# EAGLE board jst parallel (EAGLE 9.6.2)
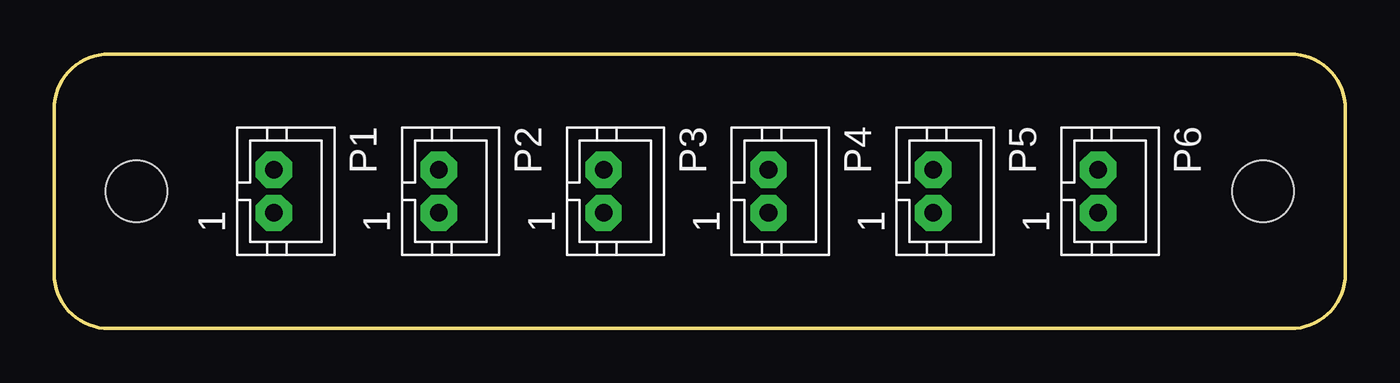
[diagram p0: board, top side]
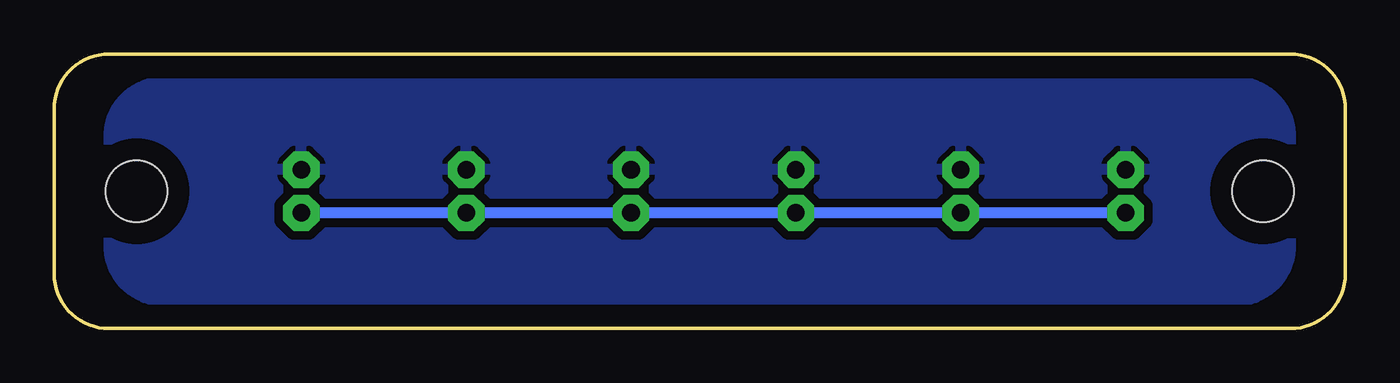
[diagram p1: board, bottom side, seen from below]

Size 59.69 x 12.7 mm. Coordinates in mm from the lower left corner, seen from the top.
Outline: 2.54,12.7 57.15,12.7 arc-90 59.69,10.16 59.69,2.54 arc-90 57.15,0 2.54,0 arc-90 0,2.54 0,10.16 arc-90 2.54,12.7
Copper layers (1*16): Top 0.035mm / dielectric 1.5mm / Bottom 0.035mm
Design rules "default": minimum track width 6mil, minimum drill 0.35mm, track to track 6mil, track to pad 6mil, pad to pad 6mil, via to via 6mil, smd to smd 6mil, copper to edge 40mil, drill to drill 6mil, minimum pad ring 10mil, minimum via ring 8mil, stop-mask expansion 4mil, vias tented up to drill 0mil, thermal gap 10mil
Holes 2.84 mm at 3.81,6.35 55.88,6.35

## Footprints (pad centres in the part's own frame; a part is rotated, then mirrored left to right if it is on the bottom)
JST-PH2 = drill 0.813 pad 1.676 octagon: 1 1,0; 2 -1,0

## Placement (x,y rotation side)
P1  [JST-PH2]  10.16,6.35 270 top
P2  [JST-PH2]  17.78,6.35 270 top
P3  [JST-PH2]  25.4,6.35 270 top
P4  [JST-PH2]  33.02,6.35 270 top
P5  [JST-PH2]  40.64,6.35 270 top
P6  [JST-PH2]  48.26,6.35 270 top

## Library data of the parts
P1-P6 = jst-ph

## Nets
GND: P1.2 P2.2 P3.2 P4.2 P5.2 P6.2
N$1: P1.1 P2.1 P3.1 P4.1 P5.1 P6.1

## Tracks (layer width: path | path; a pad name or v marks a point on that pad's centre or on a via)
GND
  pour Bottom (isolate 0.406): 5.08,1.27 54.61,1.27 arc90 57.15,3.81 57.15,8.89 arc90 54.61,11.43 5.08,11.43 arc90 2.54,8.89 2.54,3.81 arc90
N$1
  Bottom 0.508: P1.1 P2.1 P3.1 P4.1 P5.1 P6.1